# Altium PCB PCB1.PcbDoc
Units mil, origin at the board's own origin, x right, y up, seen from the top; angles counter-clockwise.
Board outline 1700 x 845 mil, 2 copper layers (Top Layer, Bottom Layer); 23 components, 42 nets, 151 pads, 27 vias.
Unrouted connection lines stored in the file: 8.
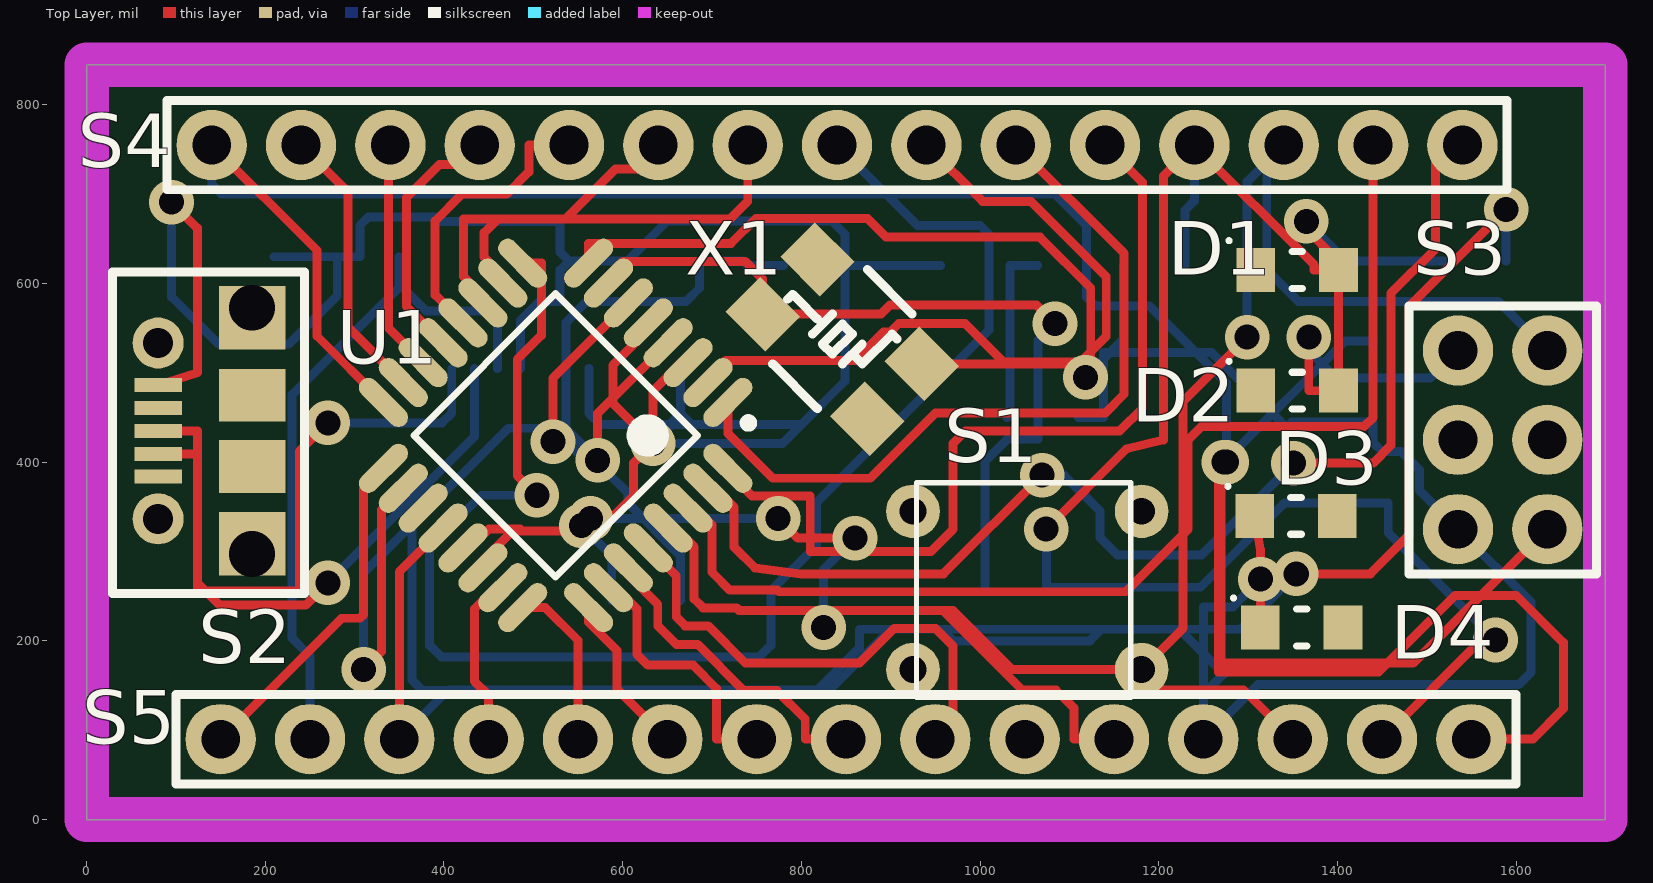
[diagram p0: Top Layer view]
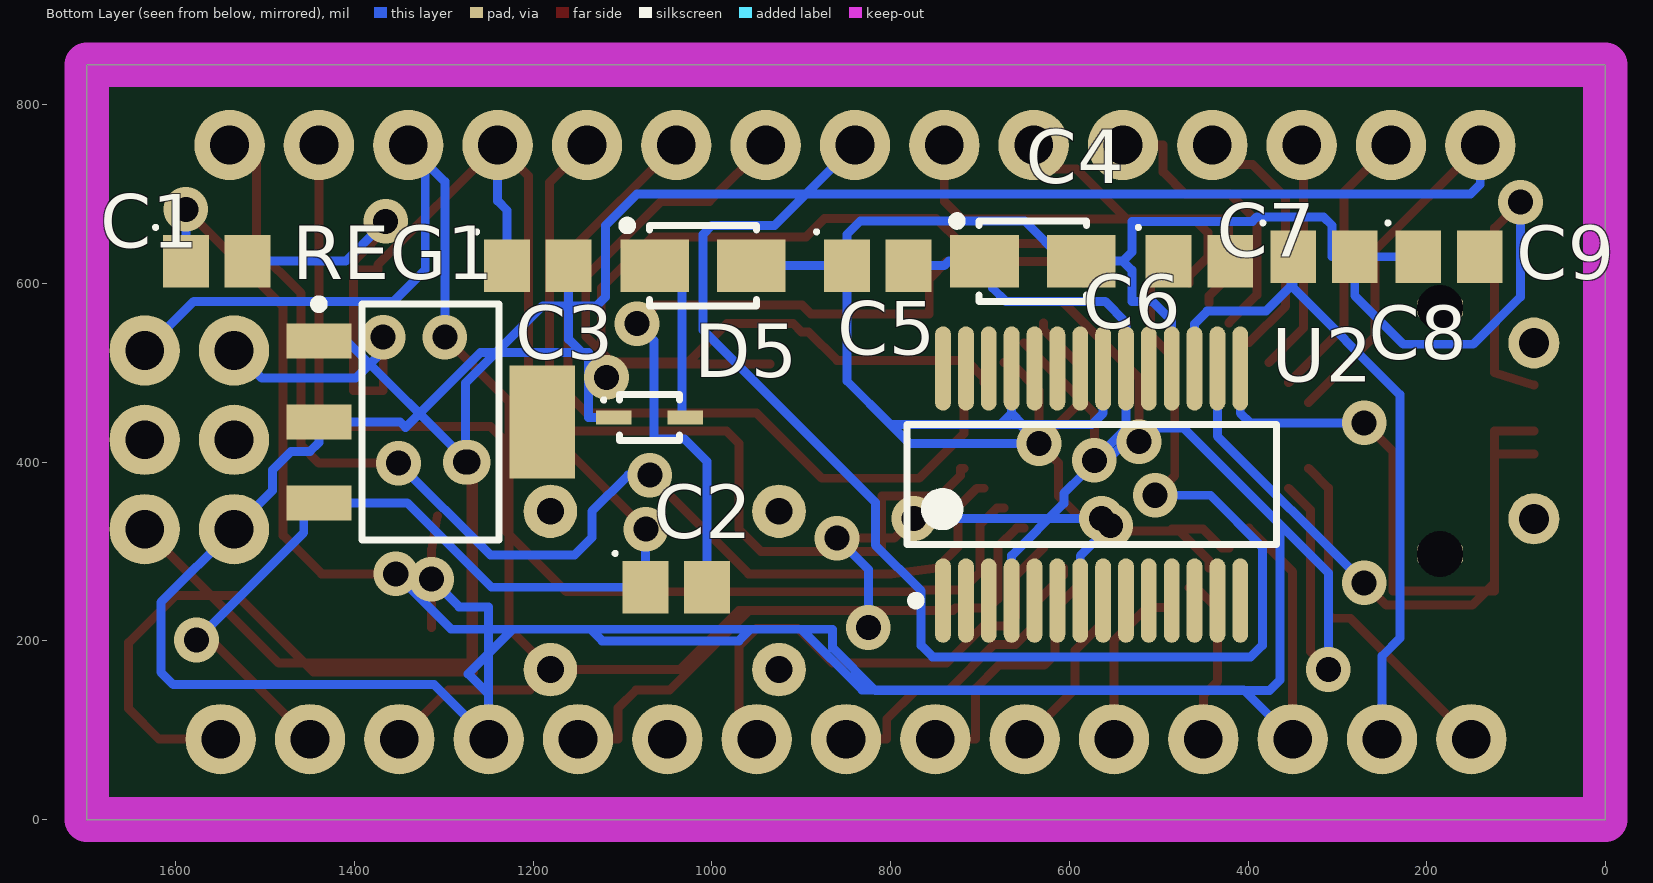
[diagram p1: Bottom Layer view, seen from below]

## Layer stack, top to bottom
Top Solder: solder mask 0.4, Solder Resist, Dk 3.5
Top Layer: signal copper 1.4
Dielectric 1: dielectric 12.6, FR-4, Dk 4.8
Bottom Layer: signal copper 1.4
Bottom Solder: solder mask 0.4, Solder Resist, Dk 3.5

## Board outline
0,0 0,845 1700,845 1700,0

## Design rules (kind name [scope] priority, off if disabled: settings)
Clearance [All] p1: gap=10 ignorepadtopadclearanceinfootprint=FALSE
PolygonConnect [All] p1: connectstyle=Relief reliefconductorwidth=10 reliefentries=4 polygonreliefangle="90 Angle" airgapwidth=10
RoutingVias [All] p1: holewidth=28 width=50 viastyle="Through Hole" minholewidth=28 minwidth=50 maxholewidth=28 maxwidth=50
SolderMaskExpansion [All] p1: expansion=4 istentingtop=FALSE
SupplyNets "Schematic Supply Nets_4" [InNet('VCC')] p1: voltage=0.000
SupplyNets "Schematic Supply Nets_3" [InNet('VUSB')] p2: voltage=0.000
SupplyNets "Schematic Supply Nets_2" [InNet('GND')] p3: voltage=0.000
SupplyNets "Schematic Supply Nets_1" [InNet('+5')] p4: voltage=0.000
SupplyNets "Schematic Supply Nets" [InNet('3V3')] p5: voltage=0.000
Width [All] p1: maxlimit=10 minlimit=10 preferedwidth=10
30 further rules are at their usual default settings.

## Components (designator, comment, footprint, x,y, rotation, side; value= is the part's Value field where it differs from the comment)
C1 "100nF Ceramic Multilayer Capacitor_1" CAPCP2012X09N 1554.45,625 r180 bottom
C2 "C0805C180J5GACTU" CAPCP2012X09N 1040,260 r180 bottom
C3 "C0805C180J5GACTU" CAPCP2012X09N 1195,620 r180 bottom
C4 "Capacitor SMT Tantalum" "CASE A - 3216X18" 640.87,625 r180 bottom value=4.7µF
C5 "100nF Ceramic Multilayer Capacitor_1" CAPCP2012X09N 814.45,620 r180 bottom
C6 "100nF Ceramic Multilayer Capacitor_1" CAPCP2012X09N 454.45,625 r180 bottom
C7 "100nF Ceramic Multilayer Capacitor_1" CAPCP2012X09N 315,630 r180 bottom
C8 "Capacitor SMT Tantalum" "CASE A - 3216X18" 1010,620 r180 bottom value=4.7µF
C9 "100nF Ceramic Multilayer Capacitor_1" CAPCP2012X09N 175,630 r180 bottom
D1 "Kingbright Blue LED, 60 mcd 120 ° 0805" LED1913X12NBLUE 1355,615 r0 top
D2 "Kingbright Red LED, 100 mcd 120 ° 0805" LED1913X12NRED 1355,480 r0 top
D3 "Kingbright Red LED, 100 mcd 120 ° 0805" LED1913X12NRED 1353.74,340 r0 top
D4 "Kingbright Green LED, 70 mcd 120 ° 0805" LED1913X12NGREEN 1360,215 r0 top
D5 "Panasonic DB2J20900L Schottky Diode, 0.5A, 20V, 2.4ns, 2-Pin SMini2 F5 B" DIOM1712X07N 1070,450 r180 bottom
REG1 "LM1117MP-5.0/NOPB, Low Dropout Voltage Regulator, 1.5A, 5 V ±1%, 4-Pin SOT-223" SOT230P700X180-4N 1315,445 r180 bottom
S1 "Tactile Switch SPST- NO 0.05A @24V" "Tactile Switch" 1180.91,167.83 r0 top
S2 "NewMolex Right Angle SMT Female Type B Micro USB Connector, 30 V ac, 1.8A" MicroUSB 80,386.57 r90 top
S3 "Programming Headers Dual Row" "ISP HEADER" 1080,-370 r90 top
S4 "connector;str header;single row;.1 cont centers;.095 tail;gold or gtx;36 contact" Header 1540,755 r180 top
S5 "connector;str header;single row;.1 cont centers;.095 tail;gold or gtx;36 contact" Header 1550,90 r180 top
U1 "ATMEGA328P-AU" TQFP80P900X900X120-32N 525,430 r225 top
U2 "FT232RL, Universal Asynchronous Receiver & Transmitter 3MBd, 28-Pin, SSOP" SOP65P780X200-28N 575,375 r90 bottom
X1 "Aker 16MHz Crystal SMT" "Aker S5C Crystal" 935,510 r315 top value=16MHz

## Footprints (in the part's own frame and the unit in brackets; to place one, negate y for a bottom-side part, rotate by r counter-clockwise, add the part's x,y. Pads: shape width x height; smd on the part's side, far side on the other; paste and mask are expansions set on the pad)
"Aker S5C Crystal" [mm]
  rect 1.6x1.4 smd: 1(0,0) 2(-4.2,0) 3(0,-2.2) 4(-4.2,-2.2)
  round 0.254 on Top Overlay: 5(-3,-2.4)
  silkscreen extent -4,-3 -1,0.8, body extent -4.7,-2.8 0.5,0.6, height 1
CAPCP2012X09N [mm] "Chip Capacitor, 2-Leads, Body 2.00x1.25mm, IPC Medium Density"
  rect 1.3x1.5 smd: 1(-0.875,0) 2(0.875,0)
  silkscreen extent -1.79,0.91 -1.69,1.01, body extent -1.05,-0.57 0.95,0.68, height 0.78
"CASE A - 3216X18" [mm] "Molded Capacitor, 2-Leads, Body 3.2x1.6mm, IPC Medium Density"
  rect 1.95x1.5 smd: 1(-1.375,0) 2(1.375,0)
  silkscreen extent -2.28,-1.14 1.52,1.27, body extent -1.52,-0.76 1.65,0.84, height 1.77
DIOM1712X07N [mm] "Molded Diode, 2-Leads, Body 1.70x1.25mm, IPC Medium Density"
  rect 1x0.4 smd: 1(-1.016,0) 2(1.016,0)
  silkscreen extent -1.35,-0.65 0.85,0.65, body extent -0.9,-0.45 0.9,0.45, height 0.8
Header [mm] "SIL Header"
  round 2 hole 1.1: 1(0,0) 2(2.54,0) 3(5.08,0) 4(7.62,0) 5(10.16,0) 6(12.7,0) 7(15.24,0) 8(17.78,0) 9(20.32,0) 10(22.86,0) 11(25.4,0) 12(27.94,0) 13(30.48,0) 14(33.02,0) 15(35.56,0)
  silkscreen extent -1.27,-1.27 36.83,1.27, body extent -1.33,-1.35 36.93,1.35, height 8.6
"ISP HEADER" [mm] "SIL Header for programming"
  round 2 hole 1.1: 1(17.653,-14.097) 2(17.653,-11.557) 3(20.193,-14.097) 4(20.193,-11.557) 5(22.733,-14.097) 6(22.733,-11.557)
  silkscreen extent 16.38,-15.49 24,-10.16, body extent 16.38,-15.37 24,-10.29, height 8
LED1913X12NBLUE [mm] "LED 2-Leads, Body 1.90x1.32mm, IPC Medium Density"
  rect 1.1x1.25 smd: 1(-1.175,0) 2(1.175,0)
  silkscreen extent -1.99,-0.53 0.15,0.89, body extent -1,-0.62 1.02,0.62, height 1.1
LED1913X12NGREEN [mm] "LED 2-Leads, Body 1.90x1.32mm, IPC Medium Density"
  rect 1.1x1.25 smd: 1(-1.175,0) 2(1.175,0)
  silkscreen extent -1.99,-0.53 0.15,0.89, body extent -1.01,-0.62 1.01,0.63, height 1.1
LED1913X12NRED [mm] "LED 2-Leads, Body 1.90x1.32mm, IPC Medium Density"
  rect 1.1x1.25 smd: 1(-1.175,0) 2(1.175,0)
  silkscreen extent -1.99,-0.53 0.15,0.89, body extent -1.02,-0.43 1.04,0.47, height 0.85
MicroUSB [mm] "MicroUSB  Molex 5Pin"
  rect 0.4x1.35 smd: 1(-0.07,0) 2(0.58,0) 3(1.23,0) 4(1.88,0) 5(2.53,0)
  rrect50% 0.6x1.3 hole 1.3: ""(-2.27,-2.667) ""(-2.27,-2.667) ""(4.73,-2.667)
  rect 1.8x1.9 smd: ""(-1.98,-2.678) ""(4.45,-2.678)
  round 1.45 hole 0.85: ""(-1.27,0) ""(3.73,0)
  rect 1.5x1.9 smd: ""(0.218,-2.678) ""(2.242,-2.678)
  silkscreen extent -3.39,-4.17 5.75,1.3, body extent -2.83,-5.32 5.37,0.11, height 2.68
SOP65P780X200-28N [mm] "SOP, 28-Leads, Body 10.20x5.30mm, Pitch 0.65mm, IPC Medium Density"
  oval 2.4x0.45 smd: 1(-3.3,4.225) 2(-3.3,3.575) 3(-3.3,2.925) 4(-3.3,2.275) 5(-3.3,1.625) 6(-3.3,0.975) 7(-3.3,0.325) 8(-3.3,-0.325) 9(-3.3,-0.975) 10(-3.3,-1.625) 11(-3.3,-2.275) 12(-3.3,-2.925) 13(-3.3,-3.575) 14(-3.3,-4.225) 15(3.3,-4.225) 16(3.3,-3.575) 17(3.3,-2.925) 18(3.3,-2.275) 19(3.3,-1.625) 20(3.3,-0.975) 21(3.3,-0.325) 22(3.3,0.325) 23(3.3,0.975) 24(3.3,1.625) 25(3.3,2.275) 26(3.3,2.925) 27(3.3,3.575) 28(3.3,4.225)
  silkscreen extent -3.42,-5.25 1.7,5.25, body extent -3.91,-5.1 3.91,5.1, height 2
SOT230P700X180-4N [mm] "SOT223, 4-Leads, Body 6.50x7.00mm (avg), Pitch 2.30mm, IPC Medium Density"
  rect 1.85x1 smd: 1(-3.175,2.3) 2(-3.175,0) 3(-3.175,-2.3)
  rect 1.85x3.2 smd: 4(3.175,0)
  silkscreen extent -3.3,-3.35 1.95,3.47, body extent -3.8,-3.12 3.29,3.38, height 1.65
"Tactile Switch" [mil]
  round 60 hole 30: 1(0,0) 2(-255.91,0) 3(0,177.17) 4(-255.91,177.17)
  silkscreen extent -252,-31 -12,209, body extent -277,-29 27,209, height 197
TQFP80P900X900X120-32N [mm] "TQFP, 32-Leads, Body 7.00x7.00mm, Pitch 0.80mm, IPC Medium Density"
  oval 1.75x0.55 smd: 1(-4.125,2.8) 2(-4.125,2) 3(-4.125,1.2) 4(-4.125,0.4) 5(-4.125,-0.4) 6(-4.125,-1.2) 7(-4.125,-2) 8(-4.125,-2.8) 17(4.125,-2.8) 18(4.125,-2) 19(4.125,-1.2) 20(4.125,-0.4) 21(4.125,0.4) 22(4.125,1.2) 23(4.125,2) 24(4.125,2.8)
  oval 0.55x1.75 smd: 9(-2.8,-4.125) 10(-2,-4.125) 11(-1.2,-4.125) 12(-0.4,-4.125) 13(0.4,-4.125) 14(1.2,-4.125) 15(2,-4.125) 16(2.8,-4.125) 25(2.8,4.125) 26(2,4.125) 27(1.2,4.125) 28(0.4,4.125) 29(-0.4,4.125) 30(-1.2,4.125) 31(-2,4.125) 32(-2.8,4.125)
  silkscreen extent -4.25,-2.85 2.85,3.75, body extent -4.45,-4.5 4.55,4.5, height 1.6

## Part data
C1 C5 C6 C7 C9: "AVX 0805 Standard 100nF Ceramic Multilayer Capacitor, 50 V dc X7R Dielectric ±10% SMD", Capacitance=100nF, Manufacturer=AVX, Package=0805, Voltage=50V, Creator="Ritesh Kanjee", Datasheet URL=http://za.rs-online.com/web/p/ceramic-multilayer-capacitors/4646688/, Date Created="18 February 2015", RS Stock No.=464-6688
C2 C3: library part "18pF Ceramic Multilayer Capacitor, 50 V dc C0G Dielectric ±5% SMD", "18pF Ceramic Multilayer Capacitor, 50 V dc C0G Dielectric ±5% SMD", Capacitance=18pF, Manufacturer=Kemet, Package=0805, Voltage=50V, Creator="Ritesh Kanjee", Datasheet URL=http://za.rs-online.com/web/p/ceramic-multilayer-capacitors/6480935/?searchTerm=C0805C180J5GACTU&relevancy-data=636F3D3226696E3D4931384E4B6E6F776E41734D504E266C753D656E266D6D3D6D61746368616C6C7061727469616C26706D3D5E5B5C707B4C7D5C707B4E647D2D2C2F255C2E5D2B2426706F3D313326736E3D592673743D4D414E5F504152545F4E554D4245522677633D424F5448267573743D4330383035433138304A35474143545526, Date Created="18 February 2015", RS Stock No.=648-0935
C4 C8: library part "4.7µF Tant RS 496-3545", "Capacitor,tantalum,SMT,16V,4.7uF,10%,A-case", Package=3216-18, Tolerance=10%, Voltage=16V, ComponentLink1Description="Supplier Website", ComponentLink1URL=http://za.rs-online.com/web/search/searchBrowseAction.html?method=getProduct&R=4963545, ComponentLink2Description="RS Data sheet", ComponentLink2URL=http://docs-europe.origin.electrocomponents.com/webdocs/04ed/0900766b804ed4cc.pdf, LatestRevisionDate=28-April-2010, Part Originator="H Theron", Publisher=DPSS, RS Stock Nr.=496-3545
D1: Color=Blue, Forward Voltage=3.2V, Manufacturer=KingBright, Manufacturer Part No.=KP-2012PBC-A, Creator="Ritesh Kanjee", Datasheet URL=http://za.rs-online.com/web/p/visible-leds/4663784/, Date Created="18 February 2015", RS Stock No.=466-3784
D2 D3: Color=RED, Forward Voltage=1.85V, Manufacturer=KingBright, Manufacturer Part No.=KP-2012SRC-PRV, Creator="Ritesh Kanjee", Datasheet URL=http://za.rs-online.com/web/p/visible-leds/4663813/, Date Created="18 February 2015", RS Stock No.=466-3813
D4: Color=Green, Forward Voltage="2.1 V", Manufacturer=KingBright, Manufacturer Part No.=KP-2012MGC, Creator="Ritesh Kanjee", Datasheet URL=http://za.rs-online.com/web/p/visible-leds/4663778/, Date Created="18 February 2015", RS Stock No.=466-3778
D5: library part "Schottky Diode, 0.5A, 20V, 2.4ns, 2-Pin SMini2 F5 B", Manufacturer=Panasonic, Manufacturer Part No.=DB2J20900L, Maximum Continuous Forward Current=0.5A, Peak Reverse Repetitive Voltage=20V, Created By="R Kanjee", Datasheet=http://docs-europe.electrocomponents.com/webdocs/1398/0900766b813986b3.pdf, Date Created="1 March 2015", RS Stock No.=713-2703
REG1: library part LM1117MP-5.0, Manufacturer="Texas Instruments", Maximum Input Voltage=15V, Output Voltage=5V, Supply Current=1.5Amps, Created By="R Kanjee", Datasheet URL=http://za.rs-online.com/web/p/low-dropout-voltage-regulators/5339583/, Date Created="26 February 2015", RS Stock No.=533-9583
S1: Manufacturer=Omron, Manufacturer Part No.=B3F1000, Creator="R Kanjee", Date Created="25 February 2015", RS Stock No.=686-6847, State="Normaly Open"
S2: library part "Micro USB Connector, 30 V ac, 1.8A", Manufacturer=Molex, Manufacturer Part No.=105017-0001, Max Current=1.8A, Max Voltage=30V, Creator="R Kanjee", Datasheet URL=http://za.rs-online.com/web/p/micro-usb-connectors/8486764/, Date Created="28 February 2015", RS Stock No=848-6764
S3: library part "Programming ISP, Programming Headers Dual Row", Current Rating="3Amps Continuous", Manufacturer=FCI, Manufacturer Part No.=68000-236HLF, Created By="R Kanjee", Date Created="1 March 2015", RS Stock No.=2509565626
S4 S5: library part "Single row; PCB headers", Current Rating="3Amps Continuous", Manufacturer=FCI, Manufacturer Part No.=68000-236HLF, Created By="R Kanjee", Date Created="1 March 2015", RS Stock No.=2509565626
U1: "ATMEGA328P-AU, 8 bit AVR Microcontroller 20MHz 1 kB, 32 kB Flash, 2 kB RAM, I2C 32-Pin TQFP", Company="Lumina Inova", Created By="Ritesh Kanjee", Datasheet URL=http://docs-europe.electrocomponents.com/webdocs/0db4/0900766b80db4deb.pdf, Date Created="14 February 2015", RS Stock No.=696-3092
U2: library part "FT232RL USB to UART, Universal Asynchronous Receiver & Transmitter 3MBd, 28-Pin, SSOP", Manufacturer="FTDI Chip", Manufacturer Part No.=FT232RL, Creator="R Kanjee", Date Created="03 March 2015", Pin Count=28, RS Stock No.=406-580
X1: library part "Aker  C5S-16.000-12-3030-X", "Aker S5C SMT Crystal", Frequency Stability=+/-30ppm, Load Capacitance=12pF, Manufacturer=Aker, Manufacturer Part #=C5S-16.000-12-3030-X, Package="3.2x5mm SMD", Creator="R Kanjee", HelpURL=http://za.rs-online.com/web/p/crystal-units/6719488/, RS="RS 671-9488", RS Stock Nr.=671-9488, Supplier=RS

## Via types
v1: diameter 50, hole 28, Top Layer to Bottom Layer, 27 vias

## Nets (pads, with @x,y where several pads share a name; then routed paths per layer and width w, separated by ;. In a path a pad name is that pad's centre, name@x,y a point inside that pad or via, vN(x,y) a via of type N, cw(c..) or ccw(c..) an arc to the next point about the centre after c; other vN are vias at no path point)
3V3: C7.1 S5.14 U2.17 | length 808.2
  Bottom Layer w10: S5.14 250,183 230,203 230,475.55 351.72,597.28 ; U2.17 459.84,555 445.84,569 380,569 351.72,597.28 ; 351.72,597.28 349.45,599.55 C7.1 351.72,597.28
+5: C4.1 C5.2 D3.1 D4.1 D5.1 REG1.2 S3.2 S5.4 U1.4 U1.6 U1.18 U2.4 U2.20 | length 4447.4
  Top Layer w10: v1(310,168) 330,188 330,346.35 U1.18 ; v1(522,423) 522,493.81 U1.6 ; v1(572,402) 572,454.73 U1.4 ; D3.1 1313.74,302.48 v1@1313.74,268.74 ; D4.1 v1@1313.74,268.74 ; v1(1314,269) v1@1313.74,268.74
  Bottom Layer w10: v1(310,168) 310,276 364,330 ; v1(572,402) 536.61,437.39 v1@536.61,437.61 ; U2.4 664.57,295.43 606.08,353.92 606.08,365 584.71,386.37 573.63,386.37 537,423 v1(522,423) v1@536.61,437.61 ; C5.2 740,620 735,625 C4.1 686,625 686,595 671,580 560,580 536.61,556.61 U2.20 v1@536.61,438 ; D5.1 1138,450 1138,523 1259,523 1343,439 1349,445 REG1.2 1440,422 1450,412 1471.11,412 1492,391.11 1492,368 S3.2 1617,243 1617,165 1603,151 1311,151 S5.4 1250,140 ; v1(1314,269) 1283,238 1250,238 1250,186 ; 364,330 472,438 522,438 v1@536.61,438 ; 364,330 364,156.37 376,144.37 817.17,144.37 865,192.2 865,213 1223,213 1250,186 ; v1@536.61,437.61 v1@536.61,438 ; 1250,140 1250,186 ; 1250,140 1273,163 1250,186
A0: S5.12 U1.23 | length 194
  Top Layer w10: S5.12 450,139 434,155 434,235.66 457.83,259.49 U1.23
A1: S5.11 U1.24 | length 187.6
  Top Layer w10: U1.24 513.3,237.22 550,200.51 S5.11
A2: S5.10 U1.25 | length 183.7
  Top Layer w10: U1.25 561.89,221 593.45,189.44 593.45,146.55 S5.10
A3: S5.9 U1.26 | length 298.9
  Top Layer w10: U1.26 592.17,259.49 615.94,235.72 615.94,185 628.16,172.79 678.87,172.79 705,146.66 705,90 S5.9
A4: S5.8 U1.27 | length 355
  Top Layer w10: U1.27 606.43,273.75 639.3,240.87 639.3,216.84 660,196.15 684.03,196.15 735.8,144.37 772.52,144.37 804.37,112.52 804.37,90 S5.8
A5: S5.7 U1.28 | length 570.1
  Top Layer w10: U1.28 660,272.73 660,226.84 670,216.84 695.66,216.84 737.5,175 865,175 904,214 950,214 970,194 970,90 S5.7
A6: S5.6 U1.19
A7: S5.5 U1.22 | length 981.8
  Top Layer w10: U1.22 443.57,289.77 476.8,323 552,323 564,335 v1(564,337) ; v1(774,337) 796,315 v1(860,315) ; v1(825,215) 844,234 958.29,234 1047.29,145 1085,145 1105,125 1105,90 S5.5
  Bottom Layer w10: v1(564,337) v1(774,337) ; v1(825,215) 825,280 v1(860,315)
AREF: C1.1 S5.13 U1.20 | length 1959.9
  Top Layer w10: S5.13 350,277.27 U1.20 ; v1(1354,275) 1437,275 1480,318 1480,574.1 v1(1588.9,683)
  Bottom Layer w10: S5.13 405,145 832,145 900,213 957,213 970,200 1123,200 1136,213 1292,213 v1(1354,275) ; C1.1 v1(1588.9,683)
D0/Rx: S4.2 U1.30 | length 1280.9
  Top Layer w10: U1.30 681.26,348.57 700,329.83 700,276.84 720,256.84 772.99,256.84 774.83,255 1163,255 1233,325 1233,425 1248,440 1430,440 1440,450 S4.2
D1/Tx: S4.1 U1.31 | length 1365.5
  Top Layer w10: U1.31 703.53,370.84 724.83,349.54 724.83,305 748.16,281.67 799.37,275 959,275 v1(1069.5,385.5) ; v1(1351,399) 1440,399 1460,419 1460,589 1510,639 1510,755 S4.1
  Bottom Layer w10: v1(1069.5,385.5) 1093.95,385.5 1134.45,345 1134.45,315.55 1153.78,296.22 1248.22,296.22 v1(1351,399)
D2: S4.5 U1.32 | length 978.4
  Top Layer w10: U1.32 722,393.11 722,385 745,362 810,362 810,300 945,300 970,325 970,421 984,435 1156.43,435 1182,460.57 1182,713 S4.5
D3: S4.6 U1.1 | length 867
  Top Layer w10: U1.1 717.78,432.22 768,382 877,382 950,455 1140,455 1161.32,476.32 1161.32,633.68 S4.6
D4: S4.7 U1.2 | length 834.8
  Top Layer w10: U1.2 695.51,494 715.51,514 860,514 891.68,545.68 899.66,545.68 909.32,555.34 983,555.34 1026.02,512.32 1112.72,512.32 1141.32,540.92 1141.32,607.68 1057,692 1003,692 S4.7
D5: S4.8 U1.9 | length 1720.2
  Top Layer w10: U1.9 509,622.78 509,542 482,515 482,385 v1(504,363)
  Bottom Layer w10: v1(504,363) 442,363 384,305 384,195 397,182 753,182 766,195 766,256 817.13,307.13 817.13,355 1010,547.87 1010,655 1000,665 930,665 S4.8
D6: S4.9 U1.10 | length 437.6
  Top Layer w10: U1.10 465.84,608.53 445,629.37 445,657 460,672 720,672 740,692 S4.9
D7: S4.10 U1.11 | length 370.9
  Top Layer w10: U1.11 443.57,586.25 422,607.83 422,672 535.93,672 591.93,728 640,728 S4.10
D8: S4.11 U1.12 | length 329.8
  Top Layer w10: U1.12 390,587.27 390,670 420,700 470,700 495,725 495,755 S4.11
D9: S4.12 U1.13 | length 298.7
  Top Layer w10: U1.13 358,574.73 358,696.11 394.89,733 440,733 S4.12
D10: S4.13 U1.14 | length 260.5
  Top Layer w10: S4.13 338,753 338,550.19 U1.14
D11/MOSI: S3.4 S4.14 U1.15 | length 313.3
  Top Layer w10: S4.14 292.7,702.3 292.7,550.94 U1.15
D12/MISO: S3.1 S4.15 U1.16 | length 2429.8
  Top Layer w10: S4.15 257.84,637.16 257.84,541.27 U1.16 ; v1(1276,400) 1270,394 1270,175 1485,175 S3.1
  Bottom Layer w10: S4.15 140,711 151,700 1084,700 1119,665 1119,585 1129,575 1189.42,575 1276,488.42 v1(1276,400)
D13/SCK: S3.3 S5.15 U1.17 | length 390.7
  Top Layer w10: S5.15 285.34,225.34 305.95,225.34 310,229.39 310,370.9 U1.17
GND: C1.2 C2.1 C3.1 C4.2 C5.1 C7.2 C8.2 C9.1 D1.2 D2.2 REG1.3 S2.5 S3.6 S4.4 S5.2 U1.3 U1.5 U1.21 U2.7 U2.18 U2.21 U2.25 | length 5543.8
  Top Layer w10: S2.5 124,500.18 124,662 v1(95,691) ; U1.21 429.32,304.03 450.29,325 485,325 487,323 v1@548,323 ; v1(554,329) v1@548,323 ; U1.5 628.7,547.96 589,508.26 589,466 v1(634,421) ; U1.3 665.23,511.43 634,480.2 v1(634,421) ; v1(1074,325) 1164,415 1205.48,425 1205.48,720.48 S4.4 1374,621 1374,615 D1.2 ; v1(1365.37,669.63) 1361,665.26 1401.26,625 D1.2 ; v1(1368,540) 1368,480 D2.2 D1.2 ; S5.2 1561,201 v1(1577,201) ; v1@548,323 573,323 612,362 612,399 v1(634,421)
  Bottom Layer w10: v1(95,691) 95,585 148,532 226,532 280.55,586.55 C7.2 ; C9.1 C7.2 ; U2.18 485.43,558.43 507,580 530,580 530,615 540,625 ; v1(554,329) 587.8,295.2 U2.7 ; U2.21 562.2,455 575.2,442 652,442 664.57,454.57 664.57,455 ; U2.25 664.57,455 ; C8.2 C5.1 ; v1(1074,325) 1074.45,324.55 C2.1 1246.83,260 1341.28,354.45 REG1.3 1457,354.45 1457,321 v1(1577,201) ; C3.1 1229.45,682 1240,692.55 S4.4 ; v1(1365.37,669.63) 1410,625 C1.2 ; v1(1368,540) 1368,525 1399,494 1504,494 S3.6 ; C7.2 306,630 306,665 315.53,674.53 390,674.53 395,669.53 530,669.53 530,635 540,625 ; 540,625 C4.2 605,625 650,670 833.9,670 848.9,655 C5.1 ; 664.57,455 677.57,442 ; 677.57,442 655,442 v1(634,421) 779,421 800,442 ; 677.57,442 800,442 ; 800,442 848.9,490.9 C5.1
NetC6_2: C6.2 U2.2
NetD1_1: D1.1
NetD2_1: D2.1
NetD3_2: D3.2
NetD4_2: D4.2
NetR6_1: U2.23
NetR7_1: U2.22
NetS2_2: S2.2 U2.16 | length 663.1
  Top Layer w10: S2.2 124,409.41 124,265 149,240 245,240 v1(270,265)
  Bottom Layer w10: v1(270,265) 434.25,429.25 U2.16
NetS2_3: S2.3 U2.15 | length 731.4
  Top Layer w10: S2.3 124,435 124,256 238,256 238,412 v1(270,444)
  Bottom Layer w10: v1(270,444) 397.66,444 408.66,455 U2.15
RESET: C6.1 S1.1 S3.5 S4.3 S5.3 U1.29 | length 1956.3
  Top Layer w10: U1.29 658.99,326.3 680,305.29 680,246.84 690,236.84 727.45,236.84 730.29,234 970,234 1036.17,167.83 S1.1 ; v1(1299,540) 1227.43,468.43 1227.43,214.36 S1.1 ; S5.3 1295,145 1203.74,145 S1.1
  Bottom Layer w10: v1(1299,540) 1299,714 S4.3@1321,736 ; S4.3 S4.3@1321,736 ; S3.5 1580,580 1356.26,580 1321,615.26 S4.3@1321,736
Rx: U2.1
Tx: U2.5
VCC: REG1.1 S5.1 | length 1095.3
  Top Layer w10: v1(1273,400) 1267,394 1267,165 1446,165 1532,251 1600,251 1653,198 1653,124 1619,90 S5.1
  Bottom Layer w10: v1(1273,400) 1408.55,535.55 REG1.1
VUSB: C8.1 C9.2 D5.2 S2.1 | length 202.1
  Bottom Layer w10: D5.2 1033.5,453.5 1033.5,620 C8.1
XTAL1: C2.2 U1.7 X1.4 | length 922.5
  Top Layer w10: U1.7 584.16,608.53 600.42,624.79 737.04,624.79 756.83,605 X1.4 889,565.68 899.32,576 1063,576 v1(1084,555)
  Bottom Layer w10: C2.2 1005.55,400.55 1031,426 1065,426 1065,536 v1(1084,555)
XTAL2: C3.2 U1.8 X1.1 | length 1073.2
  Top Layer w10: U1.8 561.89,645 721.29,645 749.29,673 874,673 895,652 1067,652 1124,595 1124,519 1117.39,512.39 1093,512.39 1090.61,510 ; X1.1 1090.61,510 ; v1(1118,495) 1103,510 1090.61,510
  Bottom Layer w10: v1(1118,495) 1160.55,537.55 C3.2
pads on no net: REG1.4 S1.2 S1.3 S1.4 S2. S2.4 U2.3 U2.6 U2.8 U2.9 U2.10 U2.11 U2.12 U2.13 U2.14 U2.19 U2.24 U2.26 U2.27 U2.28 X1.2 X1.3 X1.5

## Keep-outs
Keep-Out Layer:
  lines w50: 0,0 1700,0 1700,150 1700,845 0,845 0,150 0,0